# Altium PCB PCB2.PcbDoc
Units mm, origin at the board's own origin, x right, y up, seen from the top; angles counter-clockwise.
Board outline 152.4 x 101.6 mm, 2 copper layers (Top Layer, Bottom Layer); 15 components, 19 nets, 163 pads, 10 vias.
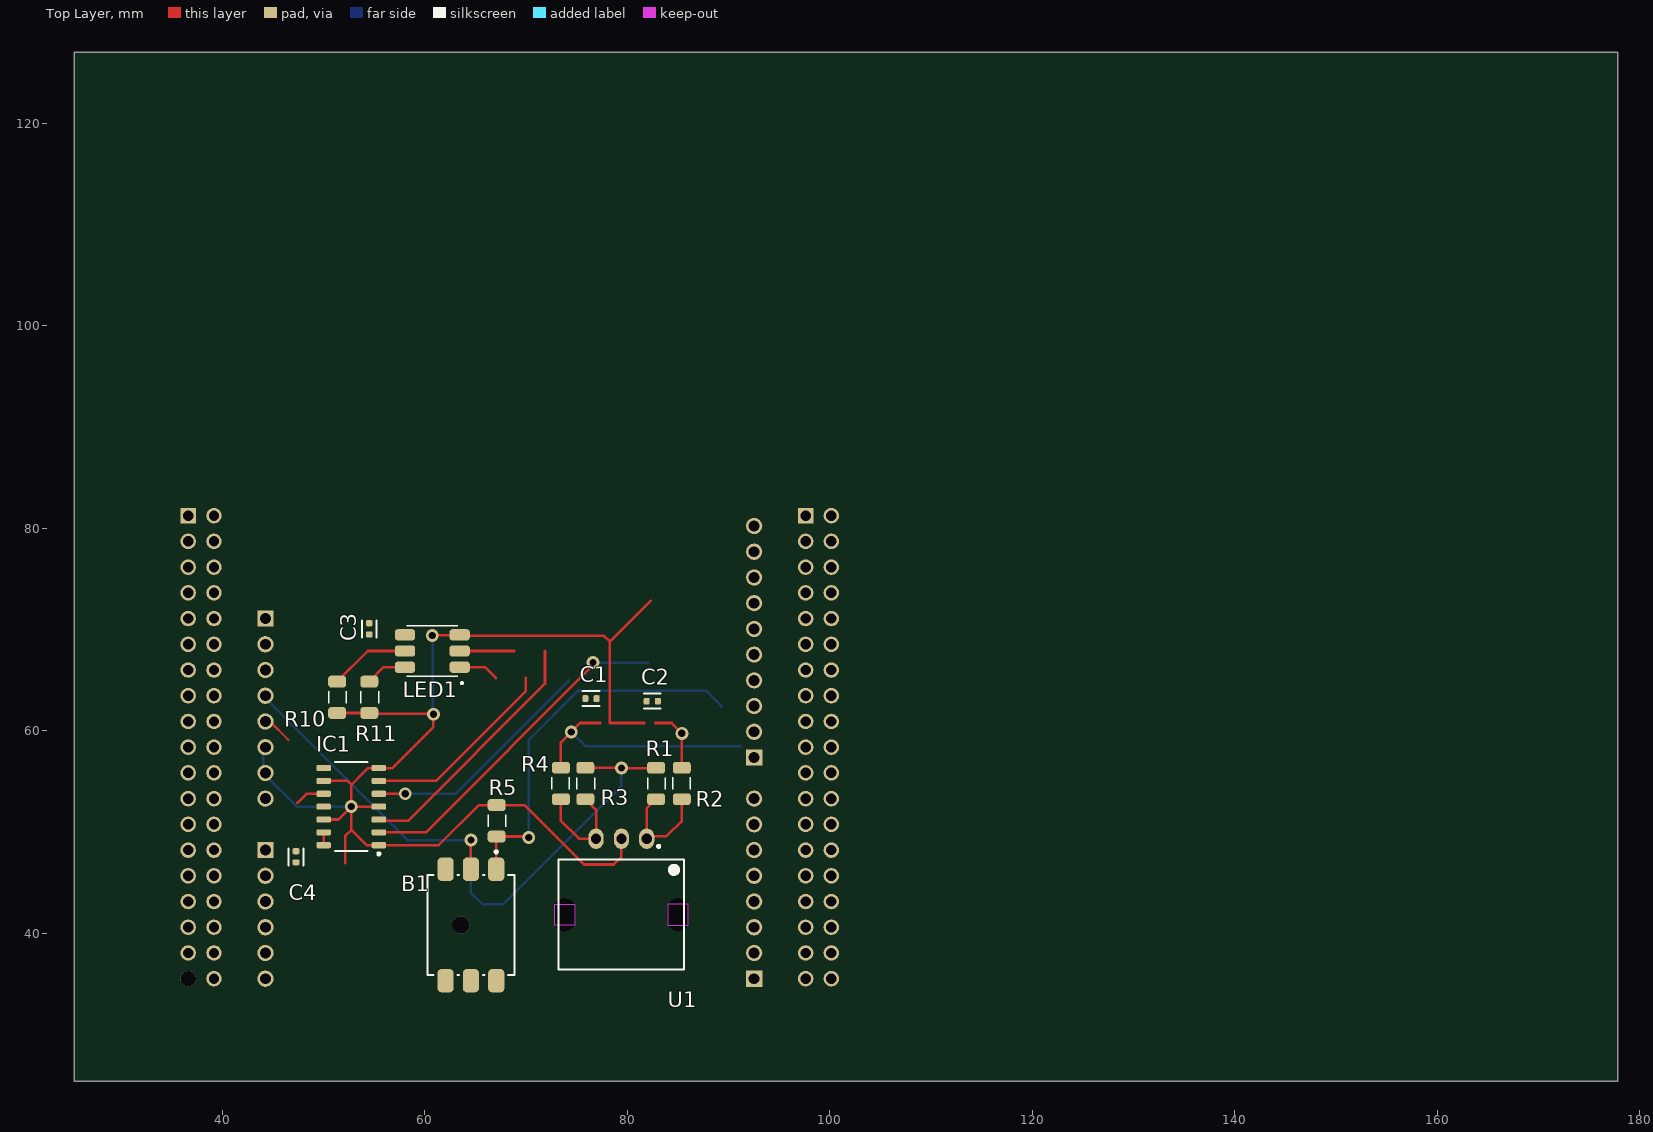
[diagram p0: Top Layer view]
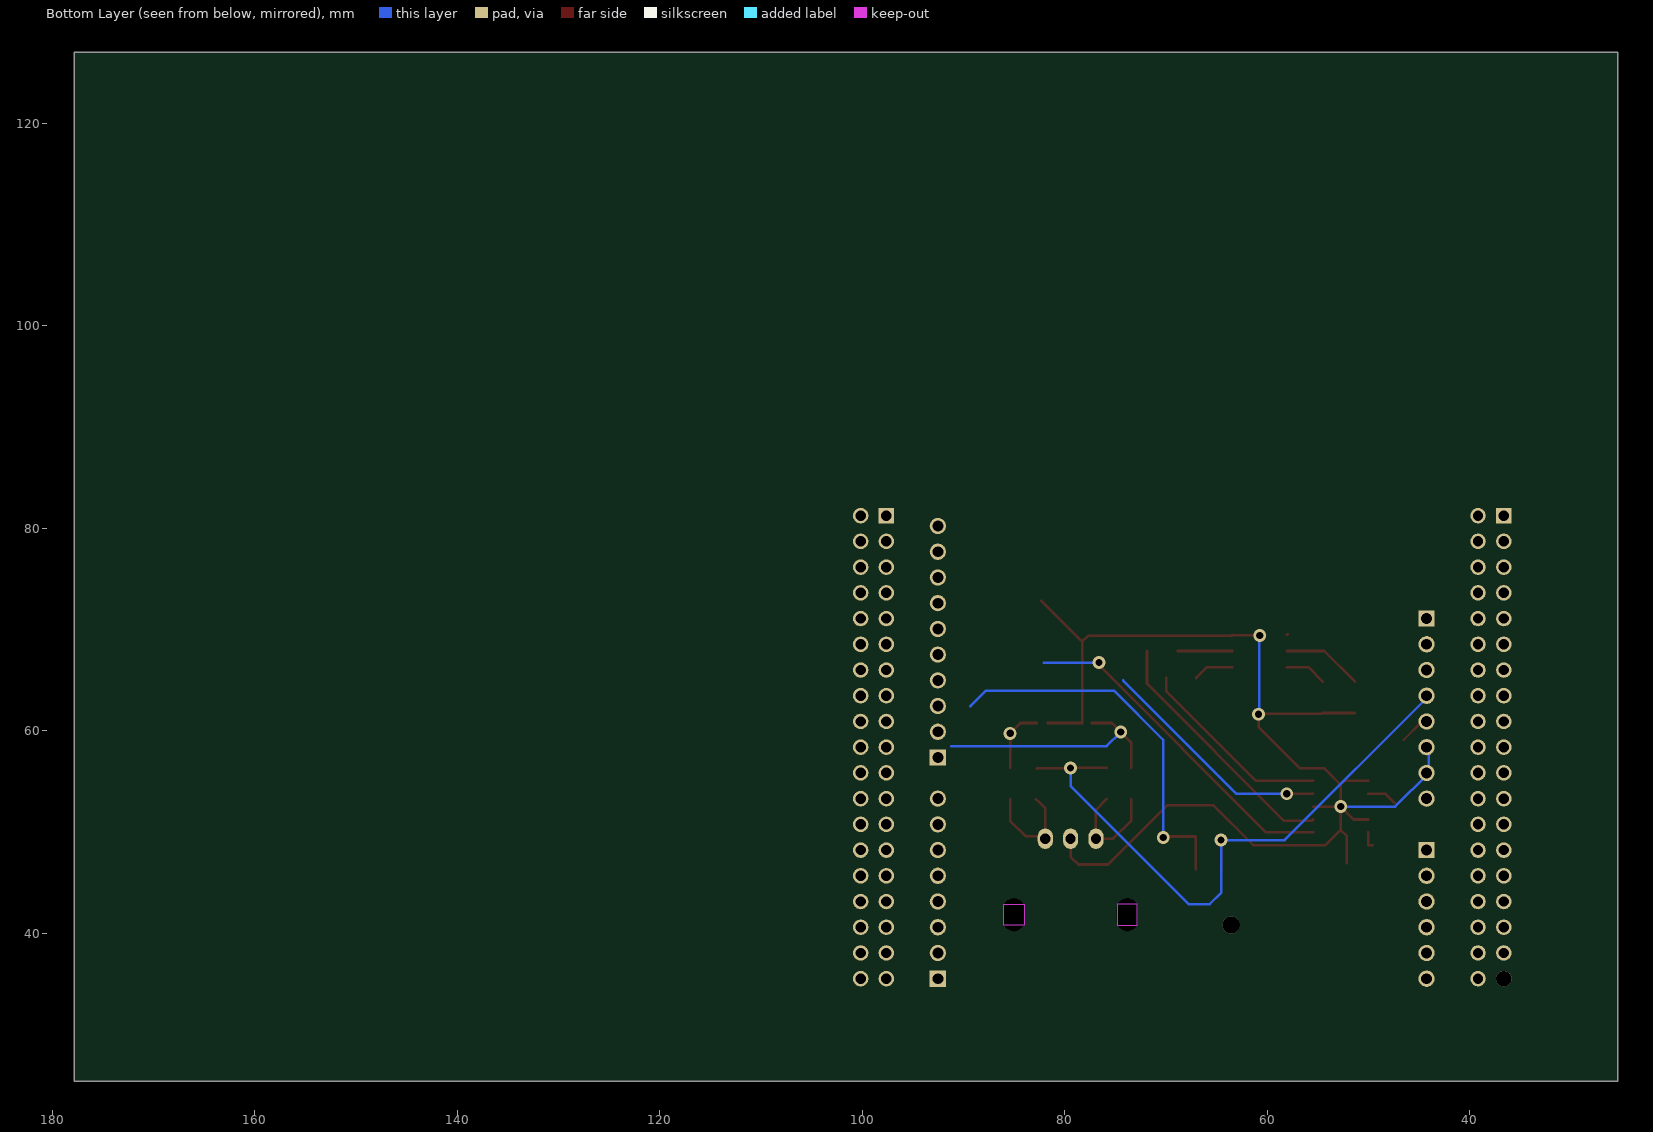
[diagram p1: Bottom Layer view, seen from below]

## Layer stack, top to bottom
Top Solder: solder mask 0.0102, Solder Resist, Dk 3.5
Top Layer: signal copper 0.0356
Dielectric 1: dielectric 0.32, FR-4, Dk 4.8
Bottom Layer: signal copper 0.0356
Bottom Solder: solder mask 0.0102, Solder Resist, Dk 3.5

## Board outline
25.4,25.4 177.8,25.4 177.8,127 25.4,127

## Design rules (kind name [scope] priority, off if disabled: settings)
Clearance [All] p1: gap=0.254 ignorepadtopadclearanceinfootprint=FALSE
PolygonConnect [All] p1: connectstyle=Relief reliefconductorwidth=0.254 reliefentries=4 polygonreliefangle="90 Angle" airgapwidth=0.254
RoutingVias [All] p1: holewidth=0.711 width=1.27 viastyle="Through Hole" minholewidth=0.711 minwidth=1.27 maxholewidth=0.711 maxwidth=1.27
SolderMaskExpansion [All] p1: expansion=0.102 istentingtop=FALSE
SupplyNets "Schematic Supply Nets_7" [InNet('+3.3_MCU')] p1: voltage=0.000
SupplyNets "Schematic Supply Nets_6" [InNet('P1_COM_3V3')] p2: voltage=0.000
SupplyNets "Schematic Supply Nets_5" [InNet('CLK_OUT')] p3: voltage=0.000
SupplyNets "Schematic Supply Nets_4" [InNet('EN1')] p4: voltage=0.000
SupplyNets "Schematic Supply Nets_3" [InNet('VCC')] p5: voltage=0.000
SupplyNets "Schematic Supply Nets_2" [InNet('CIN (LVL-SHFT)')] p6: voltage=0.000
SupplyNets "Schematic Supply Nets_1" [InNet('DIN (LVL-SHIFT)')] p7: voltage=0.000
SupplyNets "Schematic Supply Nets" [InNet('DIN_IN')] p8: voltage=0.000
Width [All] p1: maxlimit=0.254 minlimit=0.254 preferedwidth=0.254
30 further rules are at their usual default settings.

## Components (designator, comment, footprint, x,y, rotation, side; value= is the part's Value field where it differs from the comment)
B1 "ESB-33535A" SOIC_Boton 64.562,40.831 r270 top
C1 "GCM155R71H104KE02D" GCM155R71H104KE02D 76.415,63.183 r0 top value=100nF
C2 "GCM155R71H104KE02D" GCM155R71H104KE02D 82.469,62.929 r0 top value=100nF
C3 "GCM155R71H104KE02D" GCM155R71H104KE02D 54.525,70.075 r90 top value=100nF
C4 "GCM155R71H104KE02D" GCM155R71H104KE02D 47.29,47.562 r270 top value=100nF
IC1 "SN74HCT125DR" "SOIC127P600X175_HS-15N - TI" 52.751,52.515 r180 top
LED1 "BL-HBGR32L-3-TRB-8" SOIC_LEDRGB 60.752,68.136 r180 top
R1 "CR1206-JW-103ELF" Chip-Resistor-10k 82.85,54.801 r90 top value=10kΩ
R2 "CR1206-JW-103ELF" Chip-Resistor-10k 85.39,54.801 r270 top value=10kΩ
R3 "CR1206-JW-103ELF" Chip-Resistor-10k 75.865,54.801 r90 top value=10kΩ
R4 "CR1206-JW-103ELF" Chip-Resistor-10k 73.452,54.801 r270 top value=10kΩ
R5 "CR1206-JW-103ELF" Chip-Resistor-10k 67.102,51.118 r90 top value=10kΩ
R10 "CR1206-JW-103ELF" Chip-Resistor-10k 51.354,63.31 r90 top value=10kΩ
R11 "CR1206-JW-103ELF" Chip-Resistor-10k 54.529,63.31 r90 top value=10kΩ
U1 "4809-EC12E24404A6-ND" "Tray - ALPS Alpine" 79.421,41.847 r180 top

## Footprints (in the part's own frame and the unit in brackets; to place one, negate y for a bottom-side part, rotate by r counter-clockwise, add the part's x,y. Pads: shape width x height; smd on the part's side, far side on the other; paste and mask are expansions set on the pad)
Chip-Resistor-10k [mm]
  rrect50% 1.17x1.77 smd: 1(-1.55,0) 2(1.55,0)
  silkscreen extent -0.59,-0.92 0.59,0.84, body extent -1.6,-0.84 1.6,0.76, height 0.75
GCM155R71H104KE02D [mm]
  rrect50% 0.6x0.672 smd: 1(-0.55,0) 2(0.55,0)
  silkscreen extent -0.84,-0.74 0.84,0.74, body extent -1.04,-0.54 1.04,0.54, height 0.25
"SOIC127P600X175_HS-15N - TI" [mm] "SOIC, 14-Leads, Body 8,65x3,90mm, Pitch 1,27mm, Thermal Pad 7,00x3,00mm, IPC Medium Density"
  rrect50% 1.45x0.6 smd: 1(-2.725,3.81) 2(-2.725,2.54) 3(-2.725,1.27) 4(-2.725,0) 5(-2.725,-1.27) 6(-2.725,-2.54) 7(-2.725,-3.81) 8(2.725,-3.81) 9(2.725,-2.54) 10(2.725,-1.27) 11(2.725,0) 12(2.725,1.27) 13(2.725,2.54) 14(2.725,3.81)
  silkscreen extent -2.85,-4.4 1.6,4.78, body extent -3,-4.4 3,4.4, height 1.75
SOIC_Boton [mm]
  rrect50% 2.3x1.6 smd: 1(-5.5,2.5) 2(-5.5,0) 3(-5.5,-2.5) 4(5.5,-2.5) 5(5.5,0) 6(5.5,2.5)
  round 1.7 hole 1.7 unplated paste-2539.97 mask+0: ""(0,-1)
  silkscreen extent -7.35,-4.3 4.92,4.3, body extent -6.7,-4.37 6.8,4.43, height 0.25
SOIC_LEDRGB [mm]
  rrect50% 2x1.1 smd: 1(-2.7,1.854) 2(-2.7,0.254) 3(-2.7,-1.346) 4(2.7,-1.346) 5(2.7,0.254) 6(2.7,1.854)
  silkscreen extent -3.02,-2.25 2.5,3.53, body extent -2.7,-2.25 2.7,2.75, height 1.5
"Tray - ALPS Alpine" [mm]
  oval 1.5x2 hole 1: 1(-2.5,-7.5) 2(0,-7.5) 3(2.5,-7.5)
  round 1.7 hole 2.1 slot 3.25 at 90 deg unplated paste-2539.97 mask+0: ""(-5.6,0) ""(5.6,0)
  Keep-Out Layer board cut-out: 6.6,1.05 6.6,-1.05 4.6,-1.05 4.6,1.05
  Keep-Out Layer board cut-out: -6.6,1.05 -6.6,-1.05 -4.6,-1.05 -4.6,1.05
  silkscreen extent -6.2,-6.87 6.2,5.43, body extent -6.2,-6.6 6.2,6.6, height 5

## Part data
B1: "Pushbutton Switch, DPDT, Momentary, 0.2A, 14VDC, Solder Terminal, Surface Mount-straight", Case/Package=SMD/SMT, Contact Current Rating=200mA, Manufacturer=Panasonic, Max Operating Temperature=70°C, Max Voltage Rating (DC)=14V, Min Operating Temperature=-10°C, Operating Force=4N, Supplier Part Number 1=P15877SCT-ND, Actuator Length=6.5024mm, Category="Pushbutton Switches", ComponentLink1Description=https://datasheet.octopart.com:443/ESB33535A-Panasonic-datasheet-93783763.pdf?src-supplier=IHS, ComponentLink1URL=https://datasheet.octopart.com:443/ESB33535A-Panasonic-datasheet-93783763.pdf?src-supplier=IHS, ComponentLink2Description=https://datasheet.octopart.com:443/ESB-33535A-Panasonic-datasheet-138738884.pdf?src-supplier=Electro+Sonic, ComponentLink2URL=https://datasheet.octopart.com:443/ESB-33535A-Panasonic-datasheet-138738884.pdf?src-supplier=Electro+Sonic, Electrical Life=10kcycles, Height=6mm, Length=9.85mm, Lifecycle Status=Production, Manufacturer Part Number=ESB-33535A, Max Current Rating=200mA, Mounting Technology="Surface Mount", Packaging="Tape & Reel", Pricing="300=1,46613, 600=1,43739, 1200=1,41701, 2400=1,39721, 4800=1,3745 (USD)", Radiation Hardening=No, RoHS=Compliant, Schedule B="8536509030, 8536509030|8536509030|8536509030|8536509030|8536509030", Stock=5400, Supplier=Avnet, Supplier 1=DigiKey, Supplier Part Number=ESB-33535A, Termination=Solder, Throw Configuration=DPDT, Voltage Rating (DC)=14V
C1 C2 C3 C4: "50V 100nF X7R ±10% 0402 Multilayer Ceramic Capacitors MLCC - SMD/SMT ROHS", .Value=100nF, .Voltage Rating (DC)=50V, Case Code (Imperial)=0402, Case Code (Metric)=1005, Dielectric=X7R, Dielectric Material=Ceramic, Manufacturer=Murata, Manufacturer Lifecycle Status="IN PRODUCTION", Max Operating Temperature=125°C, Min Operating Temperature=-55°C, Ratings=AEC-Q200, Supplier Part Number 1=490-10672-6-ND, Tolerance=10%, Case/Package=0402, Category="Ceramic Capacitors", ComponentLink1Description=https://datasheet.octopart.com:443/GCM155R71H104KE02D-Murata-datasheet-149522465.pdf?src-supplier=Farnell, ComponentLink1URL=https://datasheet.octopart.com:443/GCM155R71H104KE02D-Murata-datasheet-149522465.pdf?src-supplier=Farnell, ComponentLink2Description=https://datasheet.octopart.com:443/GCM155R71H104KE02D-Murata-datasheet-66077033.pdf?src-supplier=element14+APAC, ComponentLink2URL=https://datasheet.octopart.com:443/GCM155R71H104KE02D-Murata-datasheet-66077033.pdf?src-supplier=element14+APAC, ComponentLink3Description=https://datasheet.octopart.com:443/GCM155R71H104KE02D-Murata-datasheet-165579661.pdf?src-supplier=TME, ComponentLink3URL=https://datasheet.octopart.com:443/GCM155R71H104KE02D-Murata-datasheet-165579661.pdf?src-supplier=TME, ComponentLink4Description=https://datasheet.octopart.com:443/GCM155R71H104KE02D-Murata-datasheet-141266224.pdf?src-supplier=Ciiva, ComponentLink4URL=https://datasheet.octopart.com:443/GCM155R71H104KE02D-Murata-datasheet-141266224.pdf?src-supplier=Ciiva, ComponentLink5Description=https://datasheet.octopart.com:443/GCM155R71H104KE02D-Murata-datasheet-140656751.pdf?src-supplier=Ciiva, ComponentLink5URL=https://datasheet.octopart.com:443/GCM155R71H104KE02D-Murata-datasheet-140656751.pdf?src-supplier=Ciiva, ComponentLink6Description=https://datasheet.octopart.com:443/GCM155R71H104KE02D-Murata-datasheet-138716456.pdf?src-supplier=Ciiva, ComponentLink6URL=https://datasheet.octopart.com:443/GCM155R71H104KE02D-Murata-datasheet-138716456.pdf?src-supplier=Ciiva, ComponentLink7Description=https://datasheet.octopart.com:443/GCM155R71H104KE02D-Murata-datasheet-12524712.pdf?src-supplier=Future+Electronics, ComponentLink7URL=https://datasheet.octopart.com:443/GCM155R71H104KE02D-Murata-datasheet-12524712.pdf?src-supplier=Future+Electronics, ComponentLink8Description=http://sigma.octopart.com:80/reach_statement/Murata-company-16.pdf?src-supplier=Compliance+Statements, ComponentLink8URL=http://sigma.octopart.com:80/reach_statement/Murata-company-16.pdf?src-supplier=Compliance+Statements, Height=500µm, Lead Free="Lead Free", Length=1mm, Lifecycle Status=Production, Manufacturer Part Number=GCM155R71H104KE02D, Material=Ceramic, Mounting Technology="Surface Mount", Number of Terminals=2, Pricing="10000=0,00604, 20000=0,00601 (USD)", REACH SVHC=Yes, RoHS=Compliant, Schedule B="8532240020, 8532240020|8532240020, 8532240020|8532240020|8532240020, 8532240020|8532240020|8532240020|8532240020", Stock=8220000, Supplier=Avnet, Supplier 1=DigiKey, Supplier Part Number=GCM155R71H104KE02D, Termination=SMD/SMT, Voltage Rating=50V, Voltage Rating (DC)=50V, Weight=6.010099mg, Width=500µm
IC1: "Buffer/Line Driver 4-CH Non-Inverting 3-ST CMOS 14-Pin SOIC T/R / IC BUS BUFF TRI-ST QD 14SOIC", Ambient Temperature Range High=85°C, Case/Package=SOIC, High Level Output Current=-6mA, Low Level Output Current=6mA, Manufacturer="Texas Instruments", Manufacturer Lifecycle Status=ACTIVE, Max Supply Voltage=5.5V, Min Operating Temperature=-40°C, Min Supply Voltage=4.5V, Nominal Supply Current=8µA, Operating Supply Voltage=5V, Supplier Part Number=296-1206-6-ND, Supplier Part Number 1=296-1206-1-ND, Category="Buffers, Drivers and Transceivers", ComponentLink1Description=https://sigma.octopart.com:443/182471030/technical_drawing/Texas-Instruments-SN74HCT125DR.pdf?src-supplier=Texas+Instruments, ComponentLink1URL=https://sigma.octopart.com:443/182471030/technical_drawing/Texas-Instruments-SN74HCT125DR.pdf?src-supplier=Texas+Instruments, ComponentLink2Description=https://octopart.com:443/opatz8j6/c1?t=kHjRTchamf1OEgcfGdw2KSUhwcpvAKIIc-FB5UHfXFvi1I-d_M1T4R10sj4ifHYz9TGNxLSUoWvIx3SI7rvC9uNSW-SqrDIJNlv8Qi0TmNa75oPoh_peB02lt99knWhhM93-ly3GiWOK9yQWYH3AEwBf5hNp6Gt2W6FXe98KXHBOttL1tX1EWPskv1yBnwYgmAirSOxf7aB0EHO2wQ5lloEzqyiVMuVQecV2n3eHBcjfYdHECec4niyiw3ZzGRWDfKyZzV94Ji-xNpTZfWKfZGH4cl8FZzb-4I3xggn-kiOsM3CTV17eBnzS-uHaZHrzlT18rfC2GREHSFSZiIHnrB4Luqi8FPpUJsgor3JQrJkpNEyuNZHLlpbV8UFZZut-UStbLh2o&src-supplier=Texas+Instruments, ComponentLink2URL=https://octopart.com:443/opatz8j6/c1?t=kHjRTchamf1OEgcfGdw2KSUhwcpvAKIIc-FB5UHfXFvi1I-d_M1T4R10sj4ifHYz9TGNxLSUoWvIx3SI7rvC9uNSW-SqrDIJNlv8Qi0TmNa75oPoh_peB02lt99knWhhM93-ly3GiWOK9yQWYH3AEwBf5hNp6Gt2W6FXe98KXHBOttL1tX1EWPskv1yBnwYgmAirSOxf7aB0EHO2wQ5lloEzqyiVMuVQecV2n3eHBcjfYdHECec4niyiw3ZzGRWDfKyZzV94Ji-xNpTZfWKfZGH4cl8FZzb-4I3xggn-kiOsM3CTV17eBnzS-uHaZHrzlT18rfC2GREHSFSZiIHnrB4Luqi8FPpUJsgor3JQrJkpNEyuNZHLlpbV8UFZZut-UStbLh2o&src-supplier=Texas+Instruments, ComponentLink3Description=https://datasheet.octopart.com:443/SN74HCT125DR-Texas-Instruments-datasheet-27379623.pdf?src-supplier=Texas+Instruments, ComponentLink3URL=https://datasheet.octopart.com:443/SN74HCT125DR-Texas-Instruments-datasheet-27379623.pdf?src-supplier=Texas+Instruments, ComponentLink4Description=https://datasheet.octopart.com:443/SN74HCT125DR-Texas-Instruments-datasheet-10254676.pdf?src-supplier=Texas+Instruments, ComponentLink4URL=https://datasheet.octopart.com:443/SN74HCT125DR-Texas-Instruments-datasheet-10254676.pdf?src-supplier=Texas+Instruments, ComponentLink5Description=https://sigma.octopart.com:443/49249646/technical_drawing/Texas-Instruments-SN74HCT125DR.pdf?src-supplier=Texas+Instruments, ComponentLink5URL=https://sigma.octopart.com:443/49249646/technical_drawing/Texas-Instruments-SN74HCT125DR.pdf?src-supplier=Texas+Instruments, ComponentLink6Description=https://datasheet.octopart.com:443/SN74HCT125DR-Texas-Instruments-datasheet-152071.pdf?src-supplier=Texas+Instruments, ComponentLink6URL=https://datasheet.octopart.com:443/SN74HCT125DR-Texas-Instruments-datasheet-152071.pdf?src-supplier=Texas+Instruments, ComponentLink7Description=https://datasheet.octopart.com:443/SN74HCT125DR-Texas-Instruments-datasheet-148780591.pdf?src-supplier=Upverter, ComponentLink7URL=https://datasheet.octopart.com:443/SN74HCT125DR-Texas-Instruments-datasheet-148780591.pdf?src-supplier=Upverter, ComponentLink8Description=https://datasheet.octopart.com:443/SN74HCT125DR-Texas-Instruments-datasheet-164417431.pdf?src-supplier=SHENGYU+ELECTRONICS, ComponentLink8URL=https://datasheet.octopart.com:443/SN74HCT125DR-Texas-Instruments-datasheet-164417431.pdf?src-supplier=SHENGYU+ELECTRONICS, ComponentLink9Description=https://datasheet.octopart.com:443/SN74HCT125DR-Texas-Instruments-datasheet-14145064.pdf?src-supplier=iiiC, ComponentLink9URL=https://datasheet.octopart.com:443/SN74HCT125DR-Texas-Instruments-datasheet-14145064.pdf?src-supplier=iiiC, ComponentLink10Description=https://datasheet.octopart.com:443/SN74HCT125DR-Texas-Instruments-datasheet-11793522.pdf?src-supplier=Arrow+Electronics, ComponentLink10URL=https://datasheet.octopart.com:443/SN74HCT125DR-Texas-Instruments-datasheet-11793522.pdf?src-supplier=Arrow+Electronics, ComponentLink11Description=https://datasheet.octopart.com:443/SN74HCT125DR-Texas-Instruments-datasheet-8637610.pdf?src-supplier=Verical, ComponentLink11URL=https://datasheet.octopart.com:443/SN74HCT125DR-Texas-Instruments-datasheet-8637610.pdf?src-supplier=Verical, ComponentLink12Description=https://datasheet.octopart.com:443/SN74HCT125DR-Texas-Instruments-datasheet-5321032.pdf?src-supplier=Verical, ComponentLink12URL=https://datasheet.octopart.com:443/SN74HCT125DR-Texas-Instruments-datasheet-5321032.pdf?src-supplier=Verical, ComponentLink13Description=https://datasheet.octopart.com:443/SN74HCT125DR-Texas-Instruments-datasheet-10451259.pdf?src-supplier=Jameco, ComponentLink13URL=https://datasheet.octopart.com:443/SN74HCT125DR-Texas-Instruments-datasheet-10451259.pdf?src-supplier=Jameco, ComponentLink14Description=https://datasheet.octopart.com:443/SN74HCT125DR-Texas-Instruments-datasheet-58090.pdf?src-supplier=DigiKey, ComponentLink14URL=https://datasheet.octopart.com:443/SN74HCT125DR-Texas-Instruments-datasheet-58090.pdf?src-supplier=DigiKey, ComponentLink15Description=https://datasheet.octopart.com:443/SN74HCT125DR-Texas-Instruments-datasheet-114889.pdf?src-supplier=Sierra+IC, ComponentLink15URL=https://datasheet.octopart.com:443/SN74HCT125DR-Texas-Instruments-datasheet-114889.pdf?src-supplier=Sierra+IC, ComponentLink16Description=http://sigma.octopart.com:80/conflict_mineral_statement/Texas-Instruments-company-63.pdf?src-supplier=Compliance+Statements, ComponentLink16URL=http://sigma.octopart.com:80/conflict_mineral_statement/Texas-Instruments-company-63.pdf?src-supplier=Compliance+Statements, ComponentLink17Description=http://sigma.octopart.com:80/reach_statement/Texas-Instruments-company-64.pdf?src-supplier=Compliance+Statements, ComponentLink17URL=http://sigma.octopart.com:80/reach_statement/Texas-Instruments-company-64.pdf?src-supplier=Compliance+Statements, Contact Plating=Gold, Height=0m, Lead Free="Lead Free", Length=8.65mm, Lifecycle Status=Production, Logic Function="Buffer, Inverting", Manufacturer Part Number=SN74HCT125DR, Max Operating Temperature=85°C, Mounting Technology="Surface Mount", Number of Bits=4, Number of Bits per Element=1, Number of Channels=4, Number of Circuits=4, Number of Elements=4, Number of Input Lines=4, Number of Inputs=2, Number of Output Lines=4, Number of Outputs=4, Packaging="Tape & Reel", Pins=14, Polarity=Non-Inverting, Pricing="1=0,36, 10=0,246, 25=0,2188, 100=0,1888, 250=0,17452, 500=0,16586, 1000=0,15874 (USD)", Propagation Delay=33ns, Quiescent Current=8µA, Radiation Hardening=No, REACH SVHC=No, RoHS=Compliant, Schedule B="8542390000, 8542390000|8542390000|8542390000|8542390000|8542390000", Stock=5749, Supplier=DigiKey, Supplier 1=DigiKey, Thickness=1.58mm, Turn-On Delay Time=36ns, Width=3.91mm
LED1: "Address Led Discrete Serial Rgb", Manufacturer="American Bright", Supplier Part Number=2007-BL-HBGR32L-3-TRB-8CT-ND, Category=Optoelectronics, ComponentLink1Description=https://datasheet.octopart.com:443/BL-HBGR32L-3-TRB-8-American-Bright-datasheet-182526079.pdf?src-supplier=Future+Electronics, ComponentLink1URL=https://datasheet.octopart.com:443/BL-HBGR32L-3-TRB-8-American-Bright-datasheet-182526079.pdf?src-supplier=Future+Electronics, Manufacturer Part Number=BL-HBGR32L-3-TRB-8, Pricing="1=1,57, 10=1,113, 100=0,8396, 500=0,7184, 1000=0,67881, 2000=0,64526, 3000=0,62806, 5000=0,60866, 7000=0,59712, 10000=0,58587 (USD)", RoHS=Compliant, Stock=52650, Supplier=DigiKey, Supplier 1=DigiKey, Supplier Part Number 1=2007-BL-HBGR32L-3-TRB-8CT-ND
R1 R2 R3 R4 R5 R10 R11: "SMD Chip Resistor, 10 kOhm, ± 5%, 250 mW, 1206 [3216 Metric], Thick Film, General Purpose", .Tolerance=5%, .Value=10kΩ, Case Code (Imperial)=1206, Case Code (Metric)=3216, Manufacturer=Vishay, Manufacturer Part Number=CRCW120610K0JNEA, Max Operating Temperature=155°C, Max Power Dissipation=250mW, Min Operating Temperature=-55°C, Supplier Part Number 1=CR1206-JW-103ELFCT-ND, Temperature Coefficient=200ppm/°C, Voltage Rating=200V, Case/Package=1206, Category="Chip SMD Resistors", China RoHS=Non-Compliant, ComponentLink1Description=https://datasheet.octopart.com:443/CRCW120610K0JNEA-Vishay-datasheet-175423584.pdf?src-supplier=IHS, ComponentLink1URL=https://datasheet.octopart.com:443/CRCW120610K0JNEA-Vishay-datasheet-175423584.pdf?src-supplier=IHS, ComponentLink2Description=https://datasheet.octopart.com:443/CRCW120610K0JNEA-Vishay-datasheet-83961561.pdf?src-supplier=Newark, ComponentLink2URL=https://datasheet.octopart.com:443/CRCW120610K0JNEA-Vishay-datasheet-83961561.pdf?src-supplier=Newark, ComponentLink3Description=https://datasheet.octopart.com:443/CRCW120610K0JNEA-Vishay-datasheet-41302739.pdf?src-supplier=Newark, ComponentLink3URL=https://datasheet.octopart.com:443/CRCW120610K0JNEA-Vishay-datasheet-41302739.pdf?src-supplier=Newark, ComponentLink4Description=https://datasheet.octopart.com:443/CRCW120610K0JNEA-Vishay-datasheet-21268114.pdf?src-supplier=Newark, ComponentLink4URL=https://datasheet.octopart.com:443/CRCW120610K0JNEA-Vishay-datasheet-21268114.pdf?src-supplier=Newark, ComponentLink5Description=https://datasheet.octopart.com:443/CRCW120610K0JNEA-Vishay-datasheet-21226360.pdf?src-supplier=Newark, ComponentLink5URL=https://datasheet.octopart.com:443/CRCW120610K0JNEA-Vishay-datasheet-21226360.pdf?src-supplier=Newark, ComponentLink6Description=https://datasheet.octopart.com:443/CRCW120610K0JNEA-Vishay-datasheet-62317937.pdf?src-supplier=element14+APAC, ComponentLink6URL=https://datasheet.octopart.com:443/CRCW120610K0JNEA-Vishay-datasheet-62317937.pdf?src-supplier=element14+APAC, ComponentLink7Description=https://datasheet.octopart.com:443/CRCW120610K0JNEA-Vishay-datasheet-66077789.pdf?src-supplier=element14+APAC, ComponentLink7URL=https://datasheet.octopart.com:443/CRCW120610K0JNEA-Vishay-datasheet-66077789.pdf?src-supplier=element14+APAC, ComponentLink8Description=https://datasheet.octopart.com:443/CRCW120610K0JNEA-Vishay-datasheet-14722531.pdf?src-supplier=element14+APAC, ComponentLink8URL=https://datasheet.octopart.com:443/CRCW120610K0JNEA-Vishay-datasheet-14722531.pdf?src-supplier=element14+APAC, ComponentLink9Description=https://datasheet.octopart.com:443/CRCW120610K0JNEA-Vishay-Dale-datasheet-41169522.pdf?src-supplier=element14+APAC, ComponentLink9URL=https://datasheet.octopart.com:443/CRCW120610K0JNEA-Vishay-Dale-datasheet-41169522.pdf?src-supplier=element14+APAC, ComponentLink10Description=https://datasheet.octopart.com:443/CRCW120610K0JNEA-Vishay-datasheet-41195454.pdf?src-supplier=Farnell, ComponentLink10URL=https://datasheet.octopart.com:443/CRCW120610K0JNEA-Vishay-datasheet-41195454.pdf?src-supplier=Farnell, ComponentLink11Description=https://datasheet.octopart.com:443/CRCW120610K0JNEA-Vishay-datasheet-13242068.pdf?src-supplier=Farnell, ComponentLink11URL=https://datasheet.octopart.com:443/CRCW120610K0JNEA-Vishay-datasheet-13242068.pdf?src-supplier=Farnell, ComponentLink12Description=https://datasheet.octopart.com:443/CRCW120610K0JNEA-Vishay-datasheet-13195083.pdf?src-supplier=Farnell, ComponentLink12URL=https://datasheet.octopart.com:443/CRCW120610K0JNEA-Vishay-datasheet-13195083.pdf?src-supplier=Farnell, ComponentLink13Description=https://datasheet.octopart.com:443/CRCW120610K0JNEA-Vishay-datasheet-13034211.pdf?src-supplier=Farnell, ComponentLink13URL=https://datasheet.octopart.com:443/CRCW120610K0JNEA-Vishay-datasheet-13034211.pdf?src-supplier=Farnell, ComponentLink14Description=https://datasheet.octopart.com:443/CRCW120610K0JNEA-Vishay-datasheet-12600034.pdf?src-supplier=Farnell, ComponentLink14URL=https://datasheet.octopart.com:443/CRCW120610K0JNEA-Vishay-datasheet-12600034.pdf?src-supplier=Farnell, ComponentLink15Description=https://datasheet.octopart.com:443/CRCW120610K0JNEA-Vishay-datasheet-12532161.pdf?src-supplier=Farnell, ComponentLink15URL=https://datasheet.octopart.com:443/CRCW120610K0JNEA-Vishay-datasheet-12532161.pdf?src-supplier=Farnell, ComponentLink16Description=https://datasheet.octopart.com:443/CRCW120610K0JNEA-Vishay-datasheet-12517896.pdf?src-supplier=Farnell, ComponentLink16URL=https://datasheet.octopart.com:443/CRCW120610K0JNEA-Vishay-datasheet-12517896.pdf?src-supplier=Farnell, ComponentLink17Description=https://datasheet.octopart.com:443/CRCW120610K0JNEA-Vishay-datasheet-12509762.pdf?src-supplier=Farnell, ComponentLink17URL=https://datasheet.octopart.com:443/CRCW120610K0JNEA-Vishay-datasheet-12509762.pdf?src-supplier=Farnell, ComponentLink18Description=https://datasheet.octopart.com:443/CRCW120610K0JNEA-Vishay-datasheet-10322335.pdf?src-supplier=Farnell, ComponentLink18URL=https://datasheet.octopart.com:443/CRCW120610K0JNEA-Vishay-datasheet-10322335.pdf?src-supplier=Farnell, ComponentLink19Description=https://datasheet.octopart.com:443/CRCW120610K0JNEA-Vishay-datasheet-8788789.pdf?src-supplier=Farnell, ComponentLink19URL=https://datasheet.octopart.com:443/CRCW120610K0JNEA-Vishay-datasheet-8788789.pdf?src-supplier=Farnell, ComponentLink20Description=https://datasheet.octopart.com:443/CRCW120610K0JNEA-Vishay-datasheet-8361388.pdf?src-supplier=Farnell, ComponentLink20URL=https://datasheet.octopart.com:443/CRCW120610K0JNEA-Vishay-datasheet-8361388.pdf?src-supplier=Farnell, ComponentLink21Description=https://datasheet.octopart.com:443/CRCW120610K0JNEA-Vishay-datasheet-546287.pdf?src-supplier=Farnell, ComponentLink21URL=https://datasheet.octopart.com:443/CRCW120610K0JNEA-Vishay-datasheet-546287.pdf?src-supplier=Farnell, ComponentLink22Description=https://datasheet.octopart.com:443/CRCW120610K0JNEA-Vishay-datasheet-5300368.pdf?src-supplier=Future+Electronics, ComponentLink22URL=https://datasheet.octopart.com:443/CRCW120610K0JNEA-Vishay-datasheet-5300368.pdf?src-supplier=Future+Electronics, ComponentLink23Description=https://datasheet.octopart.com:443/CRCW120610K0JNEA-Vishay-datasheet-62316122.pdf?src-supplier=Future+Electronics, ComponentLink23URL=https://datasheet.octopart.com:443/CRCW120610K0JNEA-Vishay-datasheet-62316122.pdf?src-supplier=Future+Electronics, ComponentLink24Description=https://datasheet.octopart.com:443/CRCW120610K0JNEA-Vishay-datasheet-5306405.pdf?src-supplier=RS+(Formerly+Allied+Electronics), ComponentLink24URL=https://datasheet.octopart.com:443/CRCW120610K0JNEA-Vishay-datasheet-5306405.pdf?src-supplier=RS+(Formerly+Allied+Electronics), ComponentLink25Description=https://datasheet.octopart.com:443/CRCW120610K0JNEA-Vishay-Dale-datasheet-47688880.pdf?src-supplier=RS+(Formerly+Allied+Electronics), ComponentLink25URL=https://datasheet.octopart.com:443/CRCW120610K0JNEA-Vishay-Dale-datasheet-47688880.pdf?src-supplier=RS+(Formerly+Allied+Electronics), ComponentLink26Description=https://datasheet.octopart.com:443/CRCW120610K0JNEA-Vishay-datasheet-12001583.pdf?src-supplier=RS+(Formerly+Allied+Electronics), ComponentLink26URL=https://datasheet.octopart.com:443/CRCW120610K0JNEA-Vishay-datasheet-12001583.pdf?src-supplier=RS+(Formerly+Allied+Electronics), ComponentLink27Description=https://datasheet.octopart.com:443/CRCW120610K0JNEA-Vishay-datasheet-17834126.pdf?src-supplier=TME, ComponentLink27URL=https://datasheet.octopart.com:443/CRCW120610K0JNEA-Vishay-datasheet-17834126.pdf?src-supplier=TME, ComponentLink28Description=https://datasheet.octopart.com/D-CRCW-e3-Standard-Thick-Film-Chip-Resistors-Vishay-datasheet-family-64.pdf, ComponentLink28URL=https://datasheet.octopart.com/D-CRCW-e3-Standard-Thick-Film-Chip-Resistors-Vishay-datasheet-family-64.pdf, ComponentLink29Description=https://datasheet.octopart.com:443/CRCW120610K0JNEA-Vishay-datasheet-8445837.pdf?src-supplier=element14, ComponentLink29URL=https://datasheet.octopart.com:443/CRCW120610K0JNEA-Vishay-datasheet-8445837.pdf?src-supplier=element14, ComponentLink30Description=https://datasheet.octopart.com:443/CRCW120610K0JNEA-Vishay-datasheet-5377184.pdf?src-supplier=Garrett, ComponentLink30URL=https://datasheet.octopart.com:443/CRCW120610K0JNEA-Vishay-datasheet-5377184.pdf?src-supplier=Garrett, ComponentLink31Description=https://datasheet.octopart.com:443/CRCW120610K0JNEA-Vishay-datasheet-148188.pdf?src-supplier=Garrett, ComponentLink31URL=https://datasheet.octopart.com:443/CRCW120610K0JNEA-Vishay-datasheet-148188.pdf?src-supplier=Garrett, ComponentLink32Description=https://datasheet.octopart.com:443/CRCW120610K0JNEA-Vishay-datasheet-41916.pdf?src-supplier=Garrett, ComponentLink32URL=https://datasheet.octopart.com:443/CRCW120610K0JNEA-Vishay-datasheet-41916.pdf?src-supplier=Garrett, ComponentLink33Description=http://sigma.octopart.com:80/rohs_certificate/D-CRCW-e3-Standard-Thick-Film-Chip-Resistors-Vishay-family-102.pdf?src-supplier=Compliance+Statements, ComponentLink33URL=http://sigma.octopart.com:80/rohs_certificate/D-CRCW-e3-Standard-Thick-Film-Chip-Resistors-Vishay-family-102.pdf?src-supplier=Compliance+Statements, ComponentLink34Description=https://datasheet.octopart.com:443/CR1206-JW-103ELF-Bourns-datasheet-159578630.pdf?src-supplier=IHS, ComponentLink34URL=https://datasheet.octopart.com:443/CR1206-JW-103ELF-Bourns-datasheet-159578630.pdf?src-supplier=IHS, ComponentLink35Description=https://datasheet.octopart.com:443/CR1206-JW-103ELF-Bourns-datasheet-181955239.pdf?src-supplier=IHS, ComponentLink35URL=https://datasheet.octopart.com:443/CR1206-JW-103ELF-Bourns-datasheet-181955239.pdf?src-supplier=IHS, ComponentLink36Description=https://datasheet.octopart.com:443/CR1206-JW-103ELF-Bourns-datasheet-68301634.pdf?src-supplier=element14+APAC, ComponentLink36URL=https://datasheet.octopart.com:443/CR1206-JW-103ELF-Bourns-datasheet-68301634.pdf?src-supplier=element14+APAC, ComponentLink37Description=https://datasheet.octopart.com:443/CR1206-JW-103ELF-Bourns-datasheet-49799764.pdf?src-supplier=element14+APAC, ComponentLink37URL=https://datasheet.octopart.com:443/CR1206-JW-103ELF-Bourns-datasheet-49799764.pdf?src-supplier=element14+APAC, ComponentLink38Description=https://datasheet.octopart.com:443/CR1206-JW-103ELF.-Bourns-datasheet-45190937.pdf?src-supplier=element14+APAC, ComponentLink38URL=https://datasheet.octopart.com:443/CR1206-JW-103ELF.-Bourns-datasheet-45190937.pdf?src-supplier=element14+APAC, ComponentLink39Description=https://datasheet.octopart.com:443/CR1206-JW-103ELF.-Bourns-datasheet-62114779.pdf?src-supplier=element14+APAC, ComponentLink39URL=https://datasheet.octopart.com:443/CR1206-JW-103ELF.-Bourns-datasheet-62114779.pdf?src-supplier=element14+APAC, ComponentLink40Description=https://datasheet.octopart.com:443/CR1206-JW-103ELF.-Bourns-datasheet-34229249.pdf?src-supplier=element14+APAC, ComponentLink40URL=https://datasheet.octopart.com:443/CR1206-JW-103ELF.-Bourns-datasheet-34229249.pdf?src-supplier=element14+APAC, ComponentLink41Description=https://datasheet.octopart.com/CR1206-JW-103ELF-Bourns-datasheet-5318152.pdf, ComponentLink41URL=https://datasheet.octopart.com/CR1206-JW-103ELF-Bourns-datasheet-5318152.pdf, ComponentLink42Description=https://datasheet.octopart.com:443/CR1206-JW-103ELF-Bourns-datasheet-154729663.pdf?src-supplier=Electro+Sonic, ComponentLink42URL=https://datasheet.octopart.com:443/CR1206-JW-103ELF-Bourns-datasheet-154729663.pdf?src-supplier=Electro+Sonic, ComponentLink43Description=https://datasheet.octopart.com:443/CR1206-JW-103ELF-Bourns-datasheet-11547086.pdf?src-supplier=Electro+Sonic, ComponentLink43URL=https://datasheet.octopart.com:443/CR1206-JW-103ELF-Bourns-datasheet-11547086.pdf?src-supplier=Electro+Sonic, ComponentLink44Description=https://datasheet.octopart.com:443/CR1206-JW-103ELF-Bourns-datasheet-28808732.pdf?src-supplier=Farnell, ComponentLink44URL=https://datasheet.octopart.com:443/CR1206-JW-103ELF-Bourns-datasheet-28808732.pdf?src-supplier=Farnell, ComponentLink45Description=https://datasheet.octopart.com:443/CR1206-JW-103ELF-Bourns-datasheet-24895818.pdf?src-supplier=Farnell, ComponentLink45URL=https://datasheet.octopart.com:443/CR1206-JW-103ELF-Bourns-datasheet-24895818.pdf?src-supplier=Farnell, ComponentLink46Description=https://datasheet.octopart.com:443/CR1206-JW-103ELF-Bourns-datasheet-22971629.pdf?src-supplier=Farnell, ComponentLink46URL=https://datasheet.octopart.com:443/CR1206-JW-103ELF-Bourns-datasheet-22971629.pdf?src-supplier=Farnell, ComponentLink47Description=https://datasheet.octopart.com:443/CR1206-JW-103ELF.-Bourns-datasheet-41232171.pdf?src-supplier=Farnell, ComponentLink47URL=https://datasheet.octopart.com:443/CR1206-JW-103ELF.-Bourns-datasheet-41232171.pdf?src-supplier=Farnell, ComponentLink48Description=https://datasheet.octopart.com:443/CR1206-JW-103ELF-Bourns-datasheet-137067991.pdf?src-supplier=X-ON, ComponentLink48URL=https://datasheet.octopart.com:443/CR1206-JW-103ELF-Bourns-datasheet-137067991.pdf?src-supplier=X-ON, ComponentLink49Description=https://datasheet.octopart.com:443/CR1206-JW-103ELF-Bourns-datasheet-140567134.pdf?src-supplier=Arrow.cn, ComponentLink49URL=https://datasheet.octopart.com:443/CR1206-JW-103ELF-Bourns-datasheet-140567134.pdf?src-supplier=Arrow.cn, ComponentLink50Description=http://sigma.octopart.com:80/conflict_mineral_statement/Bourns-company-36.pdf?src-supplier=Compliance+Statements, ComponentLink50URL=http://sigma.octopart.com:80/conflict_mineral_statement/Bourns-company-36.pdf?src-supplier=Compliance+Statements, Composition="Thick Film", Contact Plating=Tin, Depth=1.6mm, Features="Moisture Resistant", Height=550µm, Lead Free="Lead Free", Length=3.2mm, Lifecycle Status=Production, Military Standard=Not, Mounting Technology="Surface Mount", Number of Terminals=2, Number of Terminations=2, Packaging="Cut Tape", Pins=2, Power Dissipation=250mW, Power Rating=250mW, Pricing="5000=0,00338 (USD)", Radiation Hardening=No, REACH SVHC=Yes, RoHS=Compliant, Schedule B="8533210045, 8533210045|8533210045|8533210045|8533210045|8533210045|8533210045|8533210045|8533210045|8533210045, 8533210045|8533210045|8533210045|8533210045|8533210045|8533210045|8533210045|8533210045|8533210045|8533210045, 8533210045|8533210045|8533210045|8533210045|8533210045|8533210045|8533210045|8533210045|8533210045|8533210045|8533210045", Stock=700000, Supplier=Avnet, Supplier 1=DigiKey, Supplier Part Number=CRCW120610K0JNEA, Termination=SMD/SMT, Tolerance=5%, Voltage Rating (DC)=200V, Weight=10.007382mg, Width=1.6mm, Working Voltage=200V
U1: "Rotary Position Encoder, Single, 2 Channels", Manufacturer=ALPS, Manufacturer Part Number=EC12E24404A6, Max Operating Temperature=70°C, Min Operating Temperature=-10°C, Operating Supply Voltage=5V, Built in Switch=No, Category=Sensors, ComponentLink1Description=https://datasheet.octopart.com:443/EC12E24404A6-ALPS-datasheet-181954823.pdf?src-supplier=IHS, ComponentLink1URL=https://datasheet.octopart.com:443/EC12E24404A6-ALPS-datasheet-181954823.pdf?src-supplier=IHS, ComponentLink2Description=https://datasheet.octopart.com:443/EC12E24404A6-ALPS-datasheet-27704593.pdf?src-supplier=IHS, ComponentLink2URL=https://datasheet.octopart.com:443/EC12E24404A6-ALPS-datasheet-27704593.pdf?src-supplier=IHS, Hole Diameter=2mm, Lifecycle Status=Production, Mounting Technology="Through Hole", Number of Channels=2, Number of Circuits=1, Pricing="1=2,36, 5=2,026, 10=1,898, 25=1,74, 40=1,66425, 80=1,55838, 230=1,40943, 440=1,32475, 945=1,23103 (USD)", Pulses per Revolution=24, Radiation Hardening=No, REACH SVHC=No, RoHS=Compliant, Stock=2128, Supplier=DigiKey, Supplier 1=DigiKey, Supplier Part Number=4809-EC12E24404A6-ND, Supplier Part Number 1=4809-EC12E24404A6-ND, Termination=Solder

## Free pads (board coordinates)
  rect 1.605x1.605 / inner round 1.605 / far side rect 1.605x1.605 hole 1.07: 5_1(92.53,57.365) 6_1(44.27,71.085) 8_1(44.27,48.225) 9_1(92.53,35.525)
  round 1.605 hole 1.07: 5_2(92.53,59.905) 5_3(92.53,62.445) 5_4(92.53,64.985) 5_5(92.53,67.525) 5_6(92.53,70.065) 5_7(92.53,72.605) 5_8(92.53,75.145) 5_9(92.53,77.685) 5_10(92.53,80.225) 6_2(44.27,68.545) 6_3(44.27,66.005) 6_4(44.27,63.465) 6_5(44.27,60.925) 6_6(44.27,58.385) 6_7(44.27,55.845) 6_8(44.27,53.305) 8_2(44.27,45.685) 8_3(44.27,43.145) 8_4(44.27,40.605) 8_5(44.27,38.065) 8_6(44.27,35.525) 9_2(92.53,38.065) 9_3(92.53,40.605) 9_4(92.53,43.145) 9_5(92.53,45.685) 9_6(92.53,48.225) 9_7(92.53,50.765) 9_8(92.53,53.305)
  rect 1.53x1.53 / inner round 1.53 / far side rect 1.53x1.53 hole 1.02: 7_1(36.65,81.245) 10_1(97.61,81.245)
  round 1.53 hole 1.02: 7_2(39.19,81.245) 7_3(36.65,78.705) 7_4(39.19,78.705) 7_5(36.65,76.165) 7_6(39.19,76.165) 7_7(36.65,73.625) 7_8(39.19,73.625) 7_9(36.65,71.085) 7_10(39.19,71.085) 7_11(36.65,68.545) 7_12(39.19,68.545) 7_13(36.65,66.005) 7_14(39.19,66.005) 7_15(36.65,63.465) 7_16(39.19,63.465) 7_17(36.65,60.925) 7_18(39.19,60.925) 7_19(36.65,58.385) 7_20(39.19,58.385) 7_21(36.65,55.845) 7_22(39.19,55.845) 7_23(36.65,53.305) 7_24(39.19,53.305) 7_25(36.65,50.765) 7_26(39.19,50.765) 7_27(36.65,48.225) 7_28(39.19,48.225) 7_29(36.65,45.685) 7_30(39.19,45.685) 7_31(36.65,43.145) 7_32(39.19,43.145) 7_33(36.65,40.605) 7_34(39.19,40.605) 7_35(36.65,38.065) 7_36(39.19,38.065) 7_37(36.65,35.525) 7_38(39.19,35.525) 10_2(100.15,81.245) 10_3(97.61,78.705) 10_4(100.15,78.705) 10_5(97.61,76.165) 10_6(100.15,76.165) 10_7(97.61,73.625) 10_8(100.15,73.625) 10_9(97.61,71.085) 10_10(100.15,71.085) 10_11(97.61,68.545) 10_12(100.15,68.545) 10_13(97.61,66.005) 10_14(100.15,66.005) 10_15(97.61,63.465) 10_16(100.15,63.465) 10_17(97.61,60.925) 10_18(100.15,60.925) 10_19(97.61,58.385) 10_20(100.15,58.385) 10_21(97.61,55.845) 10_22(100.15,55.845) 10_23(97.61,53.305) 10_24(100.15,53.305) 10_25(97.61,50.765) 10_26(100.15,50.765) 10_27(97.61,48.225) 10_28(100.15,48.225) 10_29(97.61,45.685) 10_30(100.15,45.685) 10_31(97.61,43.145) 10_32(100.15,43.145) 10_33(97.61,40.605) 10_34(100.15,40.605) 10_35(97.61,38.065) 10_36(100.15,38.065) 10_37(97.61,35.525) 10_38(100.15,35.525)
  round 1.524 hole 1.524: 11(36.65,35.525)

## Via types
v1: diameter 1.27, hole 0.711, Top Layer to Bottom Layer, 10 vias

## Nets (pads, with @x,y where several pads share a name; then routed paths per layer and width w, separated by ;. In a path a pad name is that pad's centre, name@x,y a point inside that pad or via, vN(x,y) a via of type N, cw(c..) or ccw(c..) an arc to the next point about the centre after c; other vN are vias at no path point)
+3.3_MCU: 
"CIN (LVL-SHFT)": 
CLK_IN: 
CLK_INPUT: 
CLK_OUT: 
COUT: 
"DIN (LVL-SHIFT)": 
DIN_IN: 
DIN_OUT: 
DOUT: 
EN1: 
NetC1_2: 
NetC2_2: 
NetLED1_1: 
NetR1_1: 
NetR3_1: 
P1_COM_3V3: 
P1_NC_MCU: 
VCC: 
pads on no net: B1. B1.1 B1.2 B1.3 B1.4 B1.5 B1.6 C1.1 C1.2 C2.1 C2.2 C3.1 C3.2 C4.1 C4.2 IC1.1 IC1.2 IC1.3 IC1.4 IC1.5 IC1.6 IC1.7 IC1.8 IC1.9 IC1.10 IC1.11 IC1.12 IC1.13 IC1.14 LED1.1 LED1.2 LED1.3 LED1.4 LED1.5 LED1.6 R1.1 R1.2 R2.1 R2.2 R3.1 R3.2 R4.1 R4.2 R5.1 R5.2 R10.1 R10.2 R11.1 R11.2 U1. U1.1 U1.2 U1.3
copper on no net: | length 411.7
  Top Layer w0.254: 44.045,60.925 44.397,60.925 44.722,60.925 46.528,59.119 ; 47.417,52.896 48.306,53.785 50.026,53.785 ; 49.601,48.705 50.026,48.705 50.026,49.975 ; 50.026,51.245 51.481,51.245 v1(52.751,52.515) ; 50.026,55.055 52.37,55.055 52.751,54.674 ; 51.354,61.76 54.529,61.76 54.588,61.7 60.801,61.7 v1(60.861,61.641) 60.861,60.371 56.815,56.325 55.476,56.325 54.404,56.325 54.15,56.071 54.148,56.071 52.751,54.674 ; 51.354,64.86 54.376,67.882 58.052,67.882 ; 52.136,46.947 52.136,49.614 52.751,50.229 ; 54.529,64.86 55.951,66.282 58.052,66.282 ; 55.476,49.975 60.117,49.975 76.627,66.485 v1(76.627,66.739) ; 55.476,51.245 55.603,51.118 58.339,51.118 71.879,64.658 71.879,67.882 ; 55.476,52.515 v1(52.751,52.515) ; 55.476,53.785 v1(58.085,53.785) ; 55.476,55.055 61.133,55.055 69.974,63.896 69.974,65.215 ; 58.001,69.533 58.052,69.482 ; v1(60.752,69.406) 60.79,69.444 63.414,69.444 63.452,69.482 63.528,69.406 77.676,69.406 78.278,68.804 ; 63.452,66.282 65.957,66.282 67.024,65.215 ; 63.452,67.882 68.851,67.882 ; 64.562,46.331 v1(64.562,49.213) ; 67.062,46.331 67.062,49.528 67.102,49.568 70.176,49.568 v1(70.277,49.467) ; 73.452,53.251 73.452,51.118 75.223,49.347 76.921,49.347 76.921,52.195 75.865,53.251 ; 73.452,56.351 73.452,58.865 v1(74.468,59.881) 75.357,60.77 77.328,60.77 ; 75.865,56.351 79.395,56.351 v1(79.421,56.325) 82.697,56.325 82.76,56.261 ; 79.421,49.347 79.421,47.562 78.659,46.8 75.738,46.8 69.87,52.668 67.102,52.668 65.35,52.668 61.387,48.705 55.476,48.705 54.275,48.705 52.751,50.229 ; 81.665,60.77 78.278,60.77 78.278,68.804 ; 82.309,72.835 78.278,68.804 ; 82.765,60.77 84.374,60.77 v1(85.39,59.754) 85.39,56.351 ; 82.85,53.251 81.921,52.322 81.921,49.347 82.168,49.594 83.866,49.594 85.39,51.118 85.39,53.251 ; 52.751,50.229 v1(52.751,52.515) ; v1(52.751,52.515) 52.751,54.674
  Bottom Layer w0.254: 44.045,58.385 44.045,55.845 47.375,52.515 v1(52.751,52.515) ; 44.045,63.465 58.297,49.213 v1(64.562,49.213) 64.562,44.006 65.683,42.885 67.759,42.885 79.421,54.547 v1(79.421,56.325) ; v1(58.085,53.785) 63.038,53.785 74.238,64.985 ; v1(60.752,69.406) 60.807,69.351 60.807,61.695 v1(60.861,61.641) ; v1(70.277,49.467) 70.277,59.119 75.103,63.945 87.803,63.945 89.303,62.445 ; v1(74.468,59.881) 75.865,58.484 91.186,58.484 ; v1(76.627,66.739) 82.088,66.739

## Text inside footprints (layer, text, board x,y; h text height)
IC1: Top 3D Body "1" at 54.501,48.89 h0.5 r180
LED1: Top 3D Body "1" at 62.176,66.131 h0.6 r180
U1: Top 3D Body "1" at 82.667,47.693 h1.52 r180